# Altium PCB BATTERY-PCM.PcbDoc
Units mm, origin at the board's own origin, x right, y up, seen from the top; angles counter-clockwise.
Board outline 17.5 x 4 mm, 2 copper layers (Top Layer, Bottom Layer), stack 1.57 mm thick; 5 components, 8 nets, 22 pads, 16 vias.
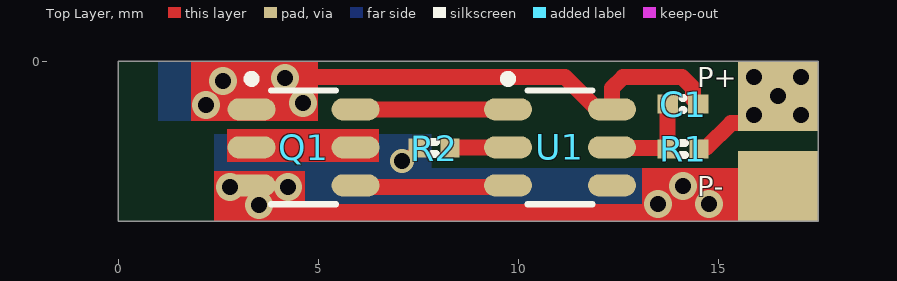
[diagram p0: Top Layer view]
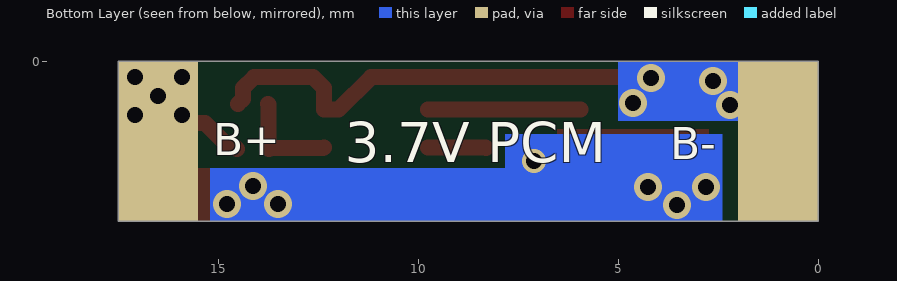
[diagram p1: Bottom Layer view, seen from below]
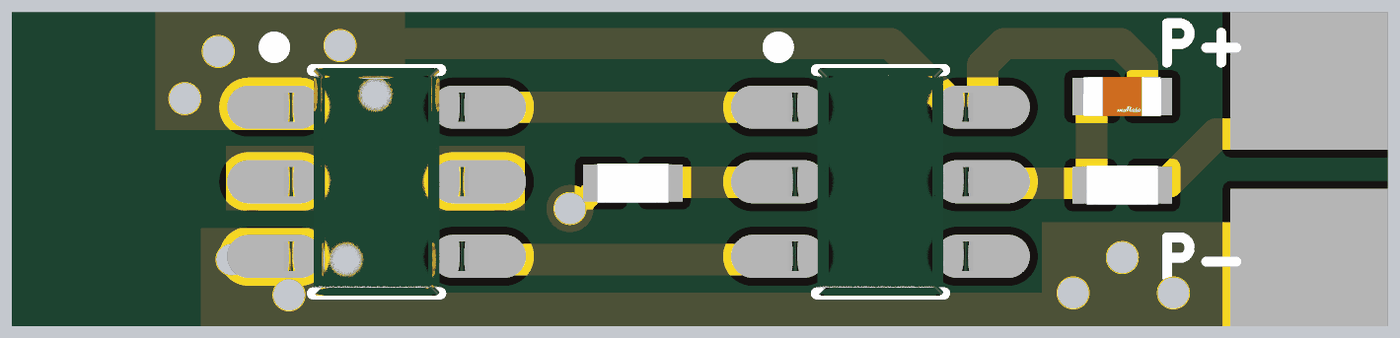
[diagram p2: 3D render of the assembled board from above, using the file's embedded part models]

## Layer stack, top to bottom
Top Solder: solder mask 0.015, Solder Resist, Dk 3.5
Top Layer: signal copper 0.035
Dielectric 1: dielectric 1.5, FR-4, Dk 4.2
Bottom Layer: signal copper 0.035
Bottom Solder: solder mask 0.015, Solder Resist, Dk 3.5

## Board outline
0,-4 0,0 17.5,0 17.5,-4

## Design rules (kind name [scope] priority, off if disabled: settings)
BoardOutlineClearance [All] p1: gap=0.2 ignorepadtopadclearanceinfootprint=FALSE
Clearance Clearance_Polygon_Fiducials [All vs InComponent('FID?')] p1: gap=1.3 ignorepadtopadclearanceinfootprint=FALSE
Clearance Clearance_Polygon [InPolygon] p2: gap=0.3 ignorepadtopadclearanceinfootprint=FALSE
Clearance [All] p3: gap=0.15 ignorepadtopadclearanceinfootprint=FALSE except(0: Arc-Hole Track-Hole SMDPad-Hole THPad-Hole Via-Hole Fill-Hole Poly-Hole Region-Hole Text-Hole)
HoleSize [All] p1: absolutevalues=TRUE maxlimit=3.5 minlimit=0.3 maxpercent=80.000 minpercent=20.000
MinimumSolderMaskSliver [All] p1: minsoldermaskwidth=0.15
PolygonConnect PolygonConnect_Via [IsVia] p1: connectstyle=Direct reliefconductorwidth=0.4 reliefentries=4 polygonreliefangle="90 Angle" airgapwidth=0.25
PolygonConnect [All] p2: connectstyle=Relief reliefconductorwidth=0.4 reliefentries=4 polygonreliefangle="90 Angle" airgapwidth=0.25
RoutingVias [All] p1: holewidth=0.4 width=0.7 viastyle="Through Hole" minholewidth=0.4 minwidth=0.6 maxholewidth=2 maxwidth=3
SilkToSilkClearance [All] p1: silktosilkclearance=0.15
SilkToSolderMaskClearance [IsPad] p1: minsilkscreentomaskgap=0.1 clearancetoexposedcopper=TRUE
SolderMaskExpansion SolderMaskExpansion_Via [IsVia] p1: expansion=0.102 istentingtop=TRUE soldermaskfromhole=TRUE
SolderMaskExpansion [All] p2: expansion=0.102 istentingtop=FALSE
Width [All] p1: maxlimit=2 minlimit=0.25 preferedwidth=0.3
26 further rules are at their usual default settings.

## Components (designator, comment, footprint, x,y, rotation, side; value= is the part's Value field where it differs from the comment)
C1 "C0805C104K5RAC7411" C0402 14.125,-1.075 r0 top value=100nF_50V
Q1 "FS8205A-SOT23" SOT-23-6 4.639,-2.159 r0 top
R1 "CRG0805F10K" R0402 14.125,-2.2 r180 top value=100
R2 "CRG0805F10K" R0402 7.9,-2.175 r180 top value=1K
U1 "DW01" SOT-23-6 11.049,-2.159 r0 top

## Footprints (in the part's own frame and the unit in brackets; to place one, negate y for a bottom-side part, rotate by r counter-clockwise, add the part's x,y. Pads: shape width x height; smd on the part's side, far side on the other; paste and mask are expansions set on the pad)
C0402 [mm] "FP-GRM155-0_05-IPC_C"
  rect 0.515x0.472 smd: 1(-0.379,0) 2(0.379,0)
  silkscreen extent -0.01,-0.15 0.01,0.15, body extent -0.74,-0.38 0.74,0.38, height 0.25
R0402 [mm] "FP-CRCW0402-e3-IPC_C"
  rect 0.468x0.472 smd: 1(-0.402,0) 2(0.402,0)
  silkscreen extent -0.05,-0.15 0.05,0.15, body extent -0.74,-0.38 0.74,0.38, height 0.25
SOT-23-6 [mm]
  oval 1.2x0.55 smd: 1(-1.3,0.95) 2(-1.3,0) 3(-1.3,-0.95) 4(1.3,-0.95) 5(1.3,0) 6(1.3,0.95)
  silkscreen extent -1.4,-1.42 0.81,1.81, body extent -1.4,-1.45 1.4,1.45, height 1.45

## Part data
C1: "C0805 0.10 μF X7R 30ppm/°C 10.00% 50 V", Capacitance=100nF, Manufacturer=KEMET, Package=C0805C-DN, Temperature="-55°C to +125°C", Temperature Characteristic=X7R, Temperature Coefficient=30ppm/°C, Temperature Range High=+125°C, Temperature Range Low=-55°C, Tolerance=0.1, Voltage Rating="50 V", Automotive=No, Category=Cap, ComponentLink2Description=Datasheet, ComponentLink2URL=https://content.kemet.com/datasheets/KEM_C1003_C0G_SMD.pdf, Device Class L1="Passive Components", Device Class L2=Capacitors, Device Class L3="Ceramic Capacitors", Height=0.88mm, Ipc Land Pattern Name=CAPC200125X78, Lead Free=Yes, Manufacturer Part Number=C0805C104K5RAC7411, Material=Ceramic, Octopart=https://octopart.com/c0805c104k5rac7411-kemet-18508045, RoHS=TRUE
Q1: "Dual N-Channel Enhancement Mode Power MOSFET", Package="Package Analog Devices", Availability=Unavailable, MF="Fortune Semiconductor", MP=FS8205A, Price=None, SnapEDA_Link=https://www.snapeda.com/parts/FS8205A/Fortune%20Semiconductor/view-part/3217108/?ref=snap
R1 R2: "RES SMD 10K OHM 1% 1/8W 0805", Case/Package=0805, Max Operating Temperature=125°C, Min Operating Temperature=-55°C, Number of Resistors=1, Power Rating=125mW, Resistor Type="Thick Film", Temperature Coefficient=100ppm/°C, Tolerance=1%, Voltage Rating=150V, Depth=1.25mm, ELV=Compliant, Height=0.55mm, Length=2mm, Mount="Surface Mount", Number of Terminations=2, Packaging="Tape and Reel", Radiation Hardening=No, RoHS Compliant=Yes, Series="CRG Series", Technology="THICK FILM", Termination=Solder
U1: "One Cell Lithium-ion/Polymer Battery Protection IC", Package="Package Analog Devices", Availability=Unavailable, MF="Fortune Semiconductor", MP=DW01A, Price=None, SnapEDA_Link=https://www.snapeda.com/parts/DW01A/Fortune%20Semiconductor/view-part/4388554/?ref=snap

## Free pads (board coordinates)
  rect 2x4 smd far side: 10(16.5,-2) 11(1,-2)
  rect 2x1.75 smd: 12(16.5,-3.125) 12(16.5,-0.875)

## Via types
v1: diameter 0.7, hole 0.4, Top Layer to Bottom Layer, tented both sides, 15 vias
v2: diameter 0.6, hole 0.4, Top Layer to Bottom Layer, tented both sides, 1 vias

## Nets (pads, with @x,y where several pads share a name; then routed paths per layer and width w, separated by ;. In a path a pad name is that pad's centre, name@x,y a point inside that pad or via, vN(x,y) a via of type N, cw(c..) or ccw(c..) an arc to the next point about the centre after c; other vN are vias at no path point)
B+_P+: pad.10 pad.12@16.5,-0.875 R1.1 | length 2.5
  Top Layer w0.4: R1.1 14.527,-2.198 14.561,-2.164 14.711,-2.164 15.325,-1.55 15.825,-1.55 v1(16.5,-0.875)
  other v1: 15.9,-1.35 17.075,-1.35 15.9,-0.4 17.075,-0.4
B-: C1.2 pad.11 Q1.1 U1.6 | length 14
  Top Layer w0.4: v1(4.175,-0.425) 4.2,-0.4 11.175,-0.4 11.984,-1.209 U1.6 12.349,-0.676 12.625,-0.4 14.1,-0.4 14.38,-0.68 14.38,-0.952 C1.2
  Bottom Layer w0.3: 3,-0.75 3.85,-0.75 ; v1(4.175,-0.425) 3.85,-0.75 ; v1(4.625,-1.05) 4.15,-1.05 3.85,-0.75
  other v1: 2.2,-1.1 2.625,-0.5
NetC1_1: C1.1 R1.2 U1.5 | length 2.5
  Top Layer w0.4: U1.5 12.369,-2.179 13.702,-2.179 R1.2 13.735,-2.188 13.735,-1.087 C1.1
NetQ1_2: Q1.2 Q1.5
NetQ1_4: Q1.4 U1.3 | length 3.8
  Top Layer w0.4: Q1.4 5.968,-3.138 6.399,-3.138 6.411,-3.15 9.342,-3.15 9.383,-3.109 U1.3
NetQ1_6: Q1.6 U1.1 | length 3.8
  Top Layer w0.4: Q1.6 U1.1
NetR2_1: R2.1 U1.2 | length 1.5
  Top Layer w0.4: R2.1 8.31,-2.167 9.741,-2.167 U1.2
P-: pad.12@16.5,-3.125 Q1.3 R2.2 | length 1.5
  Top Layer w0.3: Q1.3@2.75,-3.175 2.95,-3.375 3.525,-3.375 3.525,-3.475 v1@3.65,-3.6 ; v2@7.2,-2.45 7.225,-2.45 7.498,-2.177 R2.2
  other v1: 3.525,-3.6 13.5,-3.575 14.775,-3.575 2.8,-3.15 4.25,-3.15 14.125,-3.125
  other v2: 7.1,-2.5
pads on no net: U1.4

## Other copper
Top Layer:
  rectangle net P-: 4.175,-4 13.525,-3.575
  rectangle net P-: 13.1,-4 15.725,-2.675
  rectangle net NetQ1_2: 2.725,-2.525 6.525,-1.7
  rectangle net P-: 2.4,-4 4.675,-2.75
  rectangle net B-: 1.825,-1.5 5,0
Bottom Layer:
  rectangle net B-: 1,-1.5 5,0
  region net P-: 15.2,-2.675 15.2,-4 2.4,-4 2.4,-1.825 7.825,-1.825 7.825,-2.675

## Silkscreen, mask and mechanical layers (free items; w line width, h text height)
Top Overlay:
  text "P+" at 14.475,-0.65 h0.5
  text "P-" at 14.475,-3.375 h0.5
Bottom Overlay:
  text "B+" at 15.125,-2.35 h0.8
  text "B-" at 3.7,-2.45 h0.8
  text "3.7V PCM" at 11.834,-2.525 h1
Mechanical 1:
  the board outline again, w0.2